# EAGLE board RS485 RX (EAGLE 9.6.2)
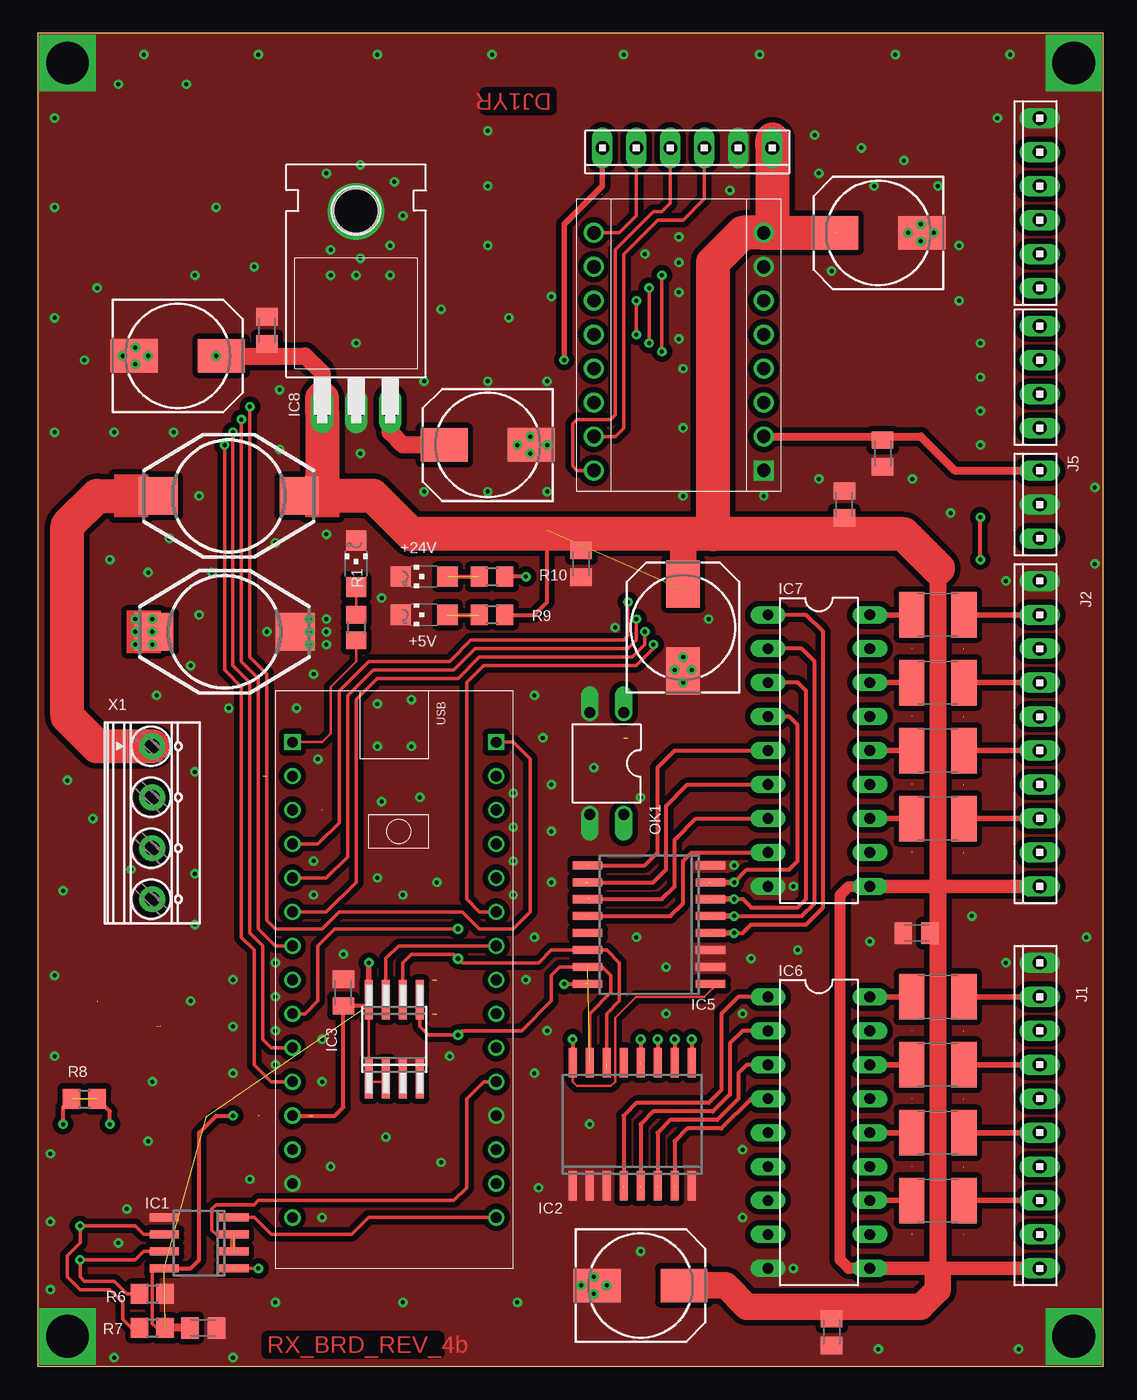
[diagram p0: board, top side]
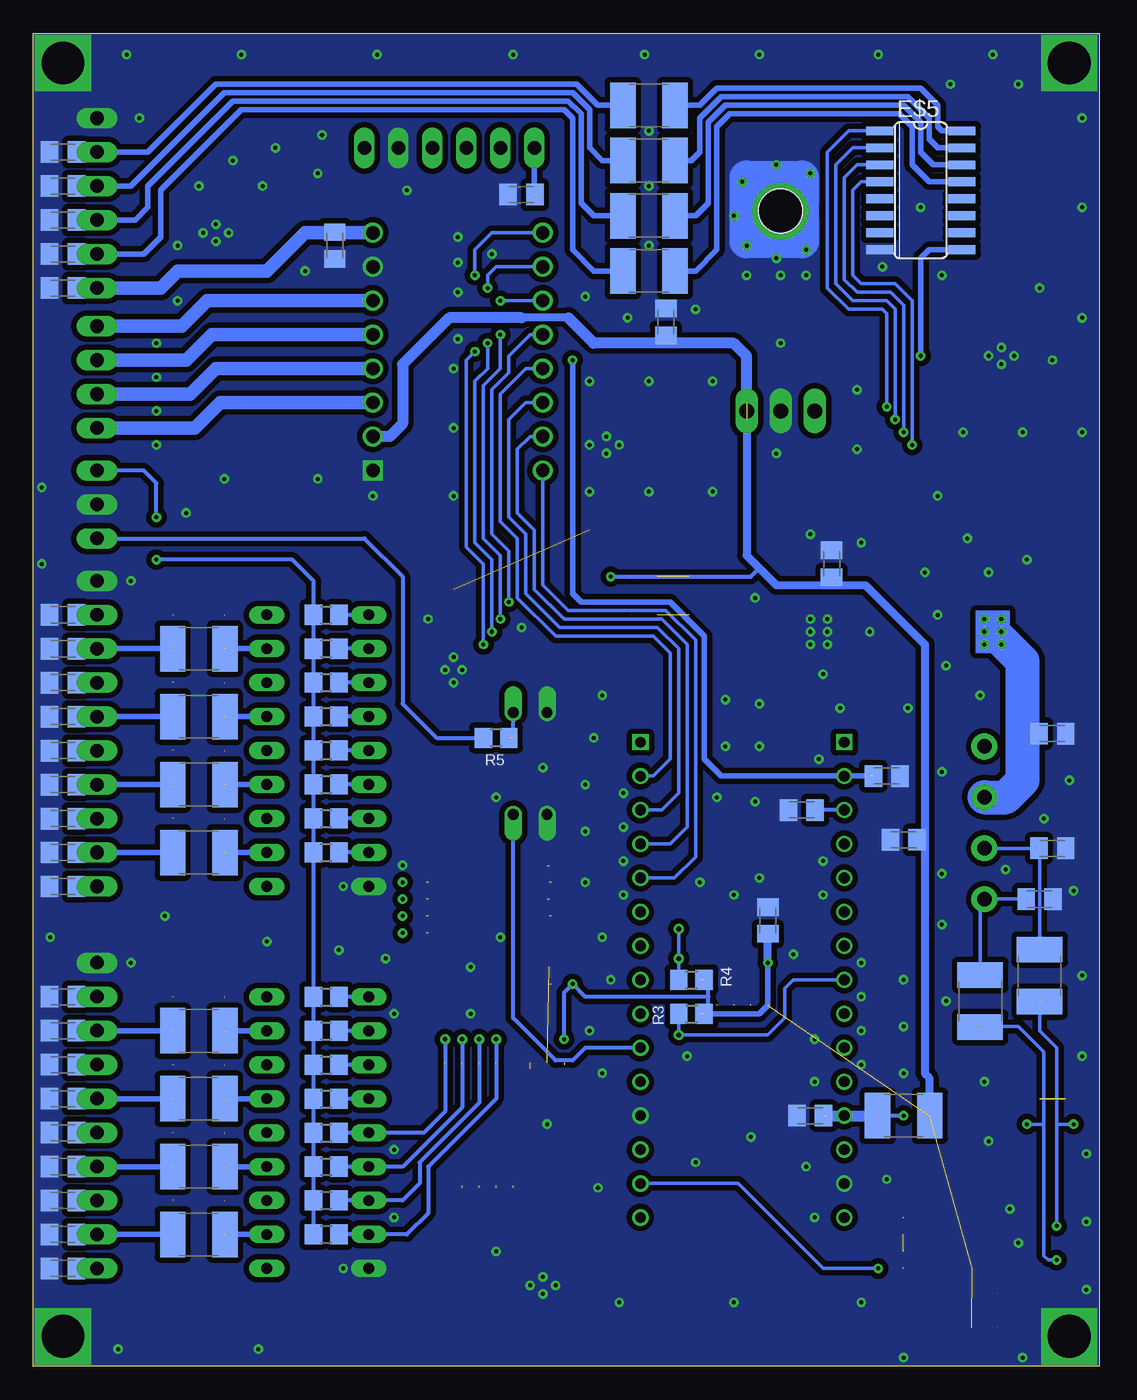
[diagram p1: board, bottom side, seen from below]

Size 79.68 x 99.69 mm. Coordinates in mm from the lower left corner, seen from the top.
Outline: 0,0 79.68,0 79.68,99.69 0,99.69 0,0
Copper layers (1*16): Top 0.035mm / dielectric 1.5mm / Bottom 0.035mm
Design rules "default *": minimum track width 6mil, minimum drill 0.35mm, track to track 6mil, track to pad 6mil, pad to pad 6mil, via to via 6mil, smd to smd 6mil, copper to edge 0mil, drill to drill 6mil, minimum pad ring 10mil, minimum via ring 8mil, stop-mask expansion 4mil, vias tented up to drill 0mil, thermal gap 10mil

## Footprints (pad centres in the part's own frame; a part is rotated, then mirrored left to right if it is on the bottom)
CHIPLED_1206 = smd 1.5 x 1.5: A 0,-1.75; C 0,1.75
C0805K = smd 1.3 x 1.6: 1 -1,0; 2 1,0
150CLZ-0810 = smd 3.5 x 2.5: + 3.25,0; - -3.25,0
10X04MTA = drill 1.016 long: 1 3.81,0; 2 1.27,0; 3 -1.27,0; 4 -3.81,0
DO3316P = smd 2.92 x 2.79: 1 -5.28,0; 2 5.28,0
SO-08M = smd 0.6 x 2.2: 1 -1.905,-3.33; 2 -0.635,-3.33; 3 0.635,-3.33; 4 1.905,-3.33; 5 1.905,3.33; 6 0.635,3.33; 7 -0.635,3.33; 8 -1.905,3.33
SO16 = smd 0.66 x 2.032: 1 -4.445,-3.073; 2 -3.175,-3.073; 3 -1.905,-3.073; 4 -0.635,-3.073; 5 0.635,-3.073; 6 1.905,-3.073; 7 3.175,-3.073; 8 4.445,-3.073; 9 4.445,3.073; 10 3.175,3.073; 11 1.905,3.073; 12 0.635,3.073; 13 -0.635,3.073; 14 -1.905,3.073; 15 -3.175,3.073; 16 -4.445,3.073
10X06MTA = drill 1.016 long: 1 6.35,0; 2 3.81,0; 3 1.27,0; 4 -1.27,0; 5 -3.81,0; 6 -6.35,0
SOIC8 = smd 0.6 x 2.2: 1 -1.905,-2.6; 2 -0.635,-2.6; 3 0.635,-2.6; 4 1.905,-2.6; 5 1.905,2.6; 6 0.635,2.6; 7 -0.635,2.6; 8 -1.905,2.6
SO16W = smd 0.6 x 2.2: 1 -4.445,-4.6; 2 -3.175,-4.6; 3 -1.905,-4.6; 4 -0.635,-4.6; 5 0.635,-4.6; 6 1.905,-4.6; 7 3.175,-4.6; 8 4.445,-4.6; 9 4.445,4.6; 10 3.175,4.6; 11 1.905,4.6; 12 0.635,4.6; 13 -0.635,4.6; 14 -1.905,4.6; 15 -3.175,4.6; 16 -4.445,4.6
SO-08 = smd 0.6 x 2.2: 1 -1.905,-2.6; 2 -0.635,-2.6; 3 0.635,-2.6; 4 1.905,-2.6; 5 1.905,2.6; 6 0.635,2.6; 7 -0.635,2.6; 8 -1.905,2.6
DIL18 = drill 0.813 long: 1 -10.16,-3.81; 2 -7.62,-3.81; 3 -5.08,-3.81; 4 -2.54,-3.81; 5 0,-3.81; 6 2.54,-3.81; 7 5.08,-3.81; 8 7.62,-3.81; 9 10.16,-3.81; 10 10.16,3.81; 11 7.62,3.81; 12 5.08,3.81; 13 2.54,3.81; 14 0,3.81; 15 -2.54,3.81; 16 -5.08,3.81; 17 -7.62,3.81; 18 -10.16,3.81
TO220H = drill 1.118 long: 1 -2.54,-10.16; 2 0,-10.16; 3 2.54,-10.16 | hole 3.302: 0,4.826
10X10MTA = drill 1.016 long: 1 11.43,0; 2 8.89,0; 3 6.35,0; 4 3.81,0; 5 1.27,0; 6 -1.27,0; 7 -3.81,0; 8 -6.35,0; 9 -8.89,0; 10 -11.43,0
10X03MTA = drill 1.016 long: 1 2.54,0; 2 0,0; 3 -2.54,0
L1812 = smd 1.9 x 3.4: 1 -1.95,0; 2 1.95,0
DIL04 = drill 0.813 offset: 1 -1.27,-3.81; 2 1.27,-3.81; 3 1.27,3.81; 4 -1.27,3.81
R0805 = smd 1.3 x 1.5: 1 -0.95,0; 2 0.95,0
1727036 = drill 1.1 pad 1.93: 1 -5.715,0; 2 -1.905,0; 3 1.905,0; 4 5.715,0

## Placement (x,y rotation side)
+5V  [CHIPLED_1206]  28.89,56.2 90 top
+5V1  [CHIPLED_1206]  23.81,60.01 0 top
+24V  [CHIPLED_1206]  28.89,59.05 90 top
C1  [C0805K]  21.59,18.73 180 bottom
C2  10µ  [150CLZ-0810]  10.48,75.56 0 top
C3  10µ  [150CLZ-0810]  33.66,68.9 180 top
C4  100µ  [150CLZ-0810]  48.26,55.24 90 top
C5  10µ  [150CLZ-0810]  45.09,6.03 0 top
C6  [C0805K]  22.23,41.59 180 bottom
C7  [C0805K]  77.47,7.3 180 bottom
C8  [C0805K]  77.47,9.84 180 bottom
C9  [C0805K]  77.47,12.38 180 bottom
C10  [C0805K]  77.47,14.92 180 bottom
C11  [C0805K]  77.47,17.46 180 bottom
C12  [C0805K]  77.47,20 180 bottom
C13  [C0805K]  77.47,22.54 180 bottom
C14  [C0805K]  77.47,25.08 180 bottom
C15  [C0805K]  77.47,27.62 180 bottom
C16  [C0805K]  77.47,35.88 180 bottom
C17  [C0805K]  77.47,38.42 180 bottom
C18  [C0805K]  77.47,40.96 180 bottom
C19  [C0805K]  77.47,43.5 180 bottom
C20  [C0805K]  77.47,46.04 180 bottom
C21  [C0805K]  77.47,48.58 180 bottom
C22  [C0805K]  77.47,51.12 180 bottom
C23  [C0805K]  77.47,53.66 180 bottom
C24  [C0805K]  77.47,56.2 180 bottom
C25  [C0805K]  59.37,2.54 270 top
C26  [C0805K]  65.72,32.38 180 top
C27  [C0805K]  60.33,64.45 90 top
C28  [C0805K]  57.15,83.82 270 bottom
C29  [C0805K]  40.64,60.01 270 top
C30  [C0805K]  63.18,68.26 270 top
C31  [C0805K]  20,60.01 90 bottom
C32  [C0805K]  32.38,78.11 90 bottom
C33  [C0805K]  17.14,77.47 90 top
C34  [C0805K]  24.77,33.34 90 bottom
C35  [C0805K]  22.86,27.94 90 top
C36  [C0805K]  12.38,2.86 0 top
C37  [C0805K]  3.49,47.31 180 bottom
C38  [C0805K]  14.61,39.37 0 bottom
C39  [C0805K]  3.49,38.73 180 bottom
C40  [C0805K]  4.45,34.92 180 bottom
C41  100µ  [150CLZ-0810]  62.87,84.77 180 top
C42  [C0805K]  77.47,83.19 180 bottom
C43  [C0805K]  77.47,80.64 180 bottom
C44  [C0805K]  77.47,85.72 180 bottom
C45  [C0805K]  77.47,88.27 180 bottom
C46  [C0805K]  77.47,90.81 180 bottom
C47  [C0805K]  43.18,87.63 180 bottom
C48  [C0805K]  15.88,44.13 0 bottom
E$1  [10X04MTA]  74.93,73.98 90 top
E$2  [DO3316P]  14.29,65.09 0 top
E$3  [DO3316P]  13.97,54.93 0 top
E$4  [SO-08M]  26.67,24.45 0 top
E$5  [SO16]  13.34,87.95 270 bottom
E$7  [10X06MTA]  48.58,91.12 180 top
IC1  LTC485S  [SOIC8]  12.06,9.21 90 top
IC2  PCF8574T  [SO16W]  44.45,18.1 0 top
IC3  24LC128SN  [SO-08]  26.67,24.45 0 top
IC5  PCF8574T  [SO16W]  45.72,33.02 90 top
IC6  [DIL18]  58.42,17.46 270 top
IC7  [DIL18]  58.42,46.04 270 top
IC8  78S05T  [TO220H]  23.81,81.6 0 top
J1  [10X10MTA]  74.93,18.73 90 top
J2  [10X10MTA]  74.93,47.31 90 top
J3  [10X06MTA]  74.93,87 90 top
J5  [10X03MTA]  74.93,64.45 90 top
L1  [L1812]  14.61,18.73 0 bottom
L2  [L1812]  67.31,27.62 0 top
L3  [L1812]  67.31,25.08 180 bottom
L4  [L1812]  67.31,22.54 0 top
L5  [L1812]  67.31,20 180 bottom
L6  [L1812]  67.31,17.46 0 top
L7  [L1812]  67.31,14.92 180 bottom
L8  [L1812]  67.31,12.38 0 top
L9  [L1812]  67.31,9.84 180 bottom
L10  [L1812]  67.31,56.2 0 top
L11  [L1812]  67.31,53.66 180 bottom
L12  [L1812]  67.31,51.12 0 top
L13  [L1812]  67.31,48.58 180 bottom
L14  [L1812]  67.31,46.04 0 top
L15  [L1812]  67.31,43.5 180 bottom
L16  [L1812]  67.31,40.96 0 top
L17  [L1812]  67.31,38.42 180 bottom
L18  [L1812]  8.89,27.3 270 bottom
L19  [L1812]  4.45,29.21 270 bottom
L20  [L1812]  33.66,94.3 180 bottom
L21  [L1812]  33.66,90.17 180 bottom
L22  [L1812]  33.66,86.04 180 bottom
L23  [L1812]  33.66,81.92 180 bottom
OK1  PC817  [DIL04]  42.55,45.09 180 top
R1  3k3  [R0805]  23.81,55.24 270 top
R3  4k7  [R0805]  30.48,26.35 0 bottom
R4  4k7  [R0805]  30.48,28.89 0 bottom
R5  330R  [R0805]  45.09,46.99 180 bottom
R6  4k7  [R0805]  8.57,5.4 0 top
R7  4k7  [R0805]  8.57,2.86 0 top
R8  120R  [R0805]  3.49,20 0 top
R9  3k3  [R0805]  33.97,56.2 180 top
R10  330R  [R0805]  33.97,59.05 0 top
R11  10k  [R0805]  57.78,9.84 0 bottom
R12  10k  [R0805]  57.78,12.38 0 bottom
R13  10k  [R0805]  57.78,14.92 0 bottom
R14  10k  [R0805]  57.78,17.46 0 bottom
R15  10k  [R0805]  57.78,20 0 bottom
R16  10k  [R0805]  57.78,22.54 0 bottom
R17  10k  [R0805]  57.78,25.08 0 bottom
R18  10k  [R0805]  57.78,27.62 0 bottom
R19  10k  [R0805]  57.78,38.42 0 bottom
R20  10k  [R0805]  57.78,40.96 0 bottom
R21  10k  [R0805]  57.78,43.5 0 bottom
R22  10k  [R0805]  57.78,46.04 0 bottom
R23  10k  [R0805]  57.78,48.58 0 bottom
R24  10k  [R0805]  57.78,51.12 0 bottom
R25  10k  [R0805]  57.78,53.66 0 bottom
R26  10k  [R0805]  57.78,56.2 0 bottom
X1  1727036  [1727036]  8.57,40.64 270 top

## Library data of the parts
+5V +5V1 +24V = led
C1-C48 = rcl; SPICEPREFIX: C
E$1 E$7 J1-J3 J5 = con-amp
E$2 E$3 = inductor-coilcraft
E$4 = microchip
E$5 IC6 IC7 = uln-udn
IC1 = 104-5
IC2 IC5 = micro-philips; MPN: PCF8574T/3,512; OC_FARNELL: 1201255; OC_NEWARK: 70R6870
IC3 = microchip; MF: MICROCHIP; MPN: 24LC128-I/SNG; OC_FARNELL: 9757937; OC_NEWARK: 30H1511
IC8 = linear
L1-L23 = rcl; SPICEPREFIX: L
OK1 = optocoupler; MPN: PC817X4J000F; OC_FARNELL: 9707727; OC_NEWARK: 97K7059
R1 R3-R26 = rcl; SPICEPREFIX: R
X1 = con-phoenix-3.81; MF: FARNELL; MPN: 1727036; OC_FARNELL: 3704592; OC_NEWARK: 71C4114

## Nets
3V3: C47.1 C48.1 E$7.1
11: E$1.4
12: E$1.3
14: E$1.1
+5V: IC1.8 IC2.16 IC3.8 IC5.16 J5.1 L1.2 R3.2 R4.2 R7.2 R10.2
+24V: C41.+ E$7.6 IC6.10 IC7.10 IC8.1 J1.10 J2.10 J3.6 R9.1
DIR: E$7.3
ENABLED: E$7.2
GND: +5V1.C +5V.C +24V.C C1.2 C2.- C3.- C4.- C5.- C6.2 C7.2 C8.2 C9.2 C10.2 C11.2 C12.2 C13.2 C14.2 C15.2 C16.2 C17.2 C18.2 C19.2 C20.2 C21.2 C22.2 C23.2 C24.2 C25.2 C26.2 C27.2 C28.2 C29.2 C30.2 C31.2 C32.2 C33.2 C34.2 C35.2 C36.2 C37.1 C38.1 C39.1 C40.1 C41.- C42.2 C43.2 C44.2 C45.2 C46.2 C47.2 C48.2 E$3.2 E$5.8 E$7.5 IC1.5 IC2.1 IC2.2 IC2.3 IC2.8 IC3.3 IC3.4 IC5.2 IC5.3 IC5.8 IC6.9 IC7.9 IC8.2 J1.1 J2.1 J3.1 J5.2 OK1.2 OK1.3 R6.2
N$9: IC2.4 IC6.1
N$10: IC2.5 IC6.2
N$11: IC2.6 IC6.3
N$13: IC2.7 IC6.4
N$14: L19.1
N$15: X1.1
N$18: IC5.4 IC7.1
N$19: IC5.5 IC7.2
N$20: IC5.6 IC7.3
N$21: IC5.7 IC7.4
N$22: IC5.9 IC7.5
N$23: IC5.10 IC7.6
N$24: IC5.11 IC7.7
N$25: IC5.12 IC7.8
N$26: IC6.18 L2.1
N$27: IC6.17 L3.1
N$28: IC6.16 L4.1
N$29: IC6.15 L5.1
N$30: IC6.14 L6.1
N$31: IC6.13 L7.1
N$32: IC6.12 L8.1
N$33: IC6.11 L9.1
N$34: IC7.18 L10.1
N$35: IC7.17 L11.1
N$36: IC7.16 L12.1
N$37: IC7.15 L13.1
N$38: IC7.14 L14.1
N$39: IC7.13 L15.1
N$40: IC7.12 L16.1
N$41: IC7.11 L17.1
N$42: J1.2 L2.2
N$43: J1.3 L3.2
N$44: J1.4 L4.2
N$45: J1.5 L5.2
N$46: J1.6 L6.2
N$47: J1.7 L7.2
N$48: J1.8 L8.2
N$49: J1.9 L9.2
N$50: J2.2 L10.2
N$51: J2.3 L11.2
N$53: J2.5 L13.2
N$54: J2.6 L14.2
N$55: J2.7 L15.2
N$56: J2.8 L16.2
N$57: J2.9 L17.2
N$58: J2.4 L12.2
N$59: OK1.1 R5.1
N$60: IC2.12 IC6.8
N$61: IC2.11 IC6.7
N$62: IC2.10 IC6.6
N$63: IC2.9 IC6.5
N$64: J5.3 R5.2
N$66: C6.1
N$68: L18.2 R6.1 R8.1
N$69: L19.2 R7.1 R8.2
N$78: C1.1 L1.1
N$80: +5V.A R9.2
N$81: +24V.A R10.1
RS_EN: IC1.2 IC1.3
RX: IC1.1
S$1: X1.2
S$2: L18.1
S$3: X1.3
S$4: X1.4
S$7: IC5.14
S$37: J3.5
S$39: J3.3
S$40: J3.2
S$41: J3.4
SCL: IC2.14 IC3.6 R4.1
SDA: IC2.15 IC3.5 IC5.15 R3.1
STEP: E$7.4
SYNC: OK1.4
TX: IC1.4
WP: IC3.7

## Tracks (layer width: path | path; a pad name or v marks a point on that pad's centre or on a via)
3V3  (via drill 0.3, 0.8)  (2 unrouted)
  Top 0.406: E$7.1 42.23,89.22 42.23,88.27 39.37,85.41 v39.37,75.25
  Bottom 0.406: v39.37,75.25 39.37,57.78 38.73,57.15 32.07,57.15 29.53,54.61 29.53,45.4 28.26,44.13 v19.05,44.13 17.14,44.13 | 42.23,87.63 E$7.1
11  (via drill 1)
  Bottom 1.016: v54.29,72.07 65.72,72.07 67.63,70.17 E$1.4
12  (via drill 1)
  Bottom 1.016: v54.29,74.61 66.04,74.61 67.94,72.71 E$1.3
13  (via drill 1)
  Bottom 1.016: v54.29,77.15 66.36,77.15 68.26,75.25 74.93,75.25
14  (via drill 1)
  Bottom 1.016: v54.29,79.69 66.67,79.69 68.58,77.79 E$1.1
+5V  (via drill 0.3, 1)  (11 unrouted)
  Top 0.203: 40.01,23.18 40.01,21.27 40.32,20.95 42.86,20.95 43.18,21.27 43.18,26.04 44.77,27.62 49.85,27.62 50.48,28.26 50.48,28.57
  Top 0.305: v40.01,24.45 40.01,23.18 40.01,22.54 | v39.37,28.57 40.96,28.57 | v36.51,59.05 R10.2 | v70.48,60.33 v70.48,63.5
  Top 0.406: v24.77,30.16 24.77,26.99
  Top 0.61: J5.1 68.58,66.99 66.04,69.53 v54.29,69.53
  Bottom 0.305: 29.84,26.35 R3.2 29.21,26.35 29.21,27.62 | 29.21,27.62 29.21,28.89 29.84,28.89 | v40.01,24.45 40.01,27.94 v39.37,28.57 38.42,27.62 29.21,27.62 | v36.51,59.05 26.04,59.05 25.4,59.69 | v70.48,60.33 60.33,60.33 58.74,58.74 58.74,9.53 | v70.48,63.5 70.48,66.04 71.44,66.99 J5.1
  Bottom 0.406: R3.2 25.4,26.35 24.77,26.99 v24.77,30.16
  Bottom 0.61: 26.35,70.8 26.35,60.64 25.4,59.69 24.13,58.42 17.46,58.42 13.02,53.98 13.02,21.91 12.7,21.59 12.7,18.73 | 39.69,78.42 43.18,78.42 | v24.77,30.16 24.77,32.38
  Bottom 0.813: 26.35,72.07 26.35,75.56 27.3,76.52 37.78,76.52 39.69,78.42 | 43.18,78.42 48.58,78.42 52.07,74.93 52.07,70.48 53.02,69.53 v54.29,69.53
+24V  (via drill 0.3, 1)  (3 unrouted)
  Top 0.305: R9.1 37.15,56.2 38.1,57.15 38.1,62.55
  Top 0.813: IC6.10 60.64,7.3 60.01,7.94 60.01,35.24 60.64,35.88 IC7.10
  Top 1.016: J1.10 IC6.10 | J2.10 67.31,35.88 IC7.10
  Top 1.27: 67.31,59.69 67.31,35.88 67.31,6.67 67.31,6.03 | v13.34,75.56 20,75.56 21.27,74.3 21.27,72.07
  Top 2: 48.26,58.1 48.26,62.23 | 48.26,6.03 51.44,6.03 53.02,4.45 66.04,4.45 67.31,5.71 67.31,6.67
  Top 2.54: 67.31,59.69 64.77,62.23 50.48,62.23 | 50.48,62.23 48.26,62.23 27.94,62.23 25.08,65.09 21.27,65.09 | 21.27,65.09 19.68,65.09 | 50.48,62.23 50.48,82.55 52.7,84.77 v54.29,84.77 54.93,84.77 | 21.27,72.39 21.27,72.07 IC8.1 21.27,65.09 | 54.93,84.77 59.69,84.77 | 54.93,91.76 E$7.6 54.93,84.77
  Bottom 0.406: 10.16,83.5 12.7,83.5 13.34,82.87 v13.34,75.56
  Bottom 1.016: v54.29,84.77 59.37,84.77 62.23,81.92 68.9,81.92 70.17,80.64 J3.6
DIR  (via drill 1)
  Top 0.254: E$7.3 47.31,87 46.67,86.36 46.04,86.36 43.18,83.5 43.18,71.12 42.86,70.8 40.32,70.8 40.01,70.48 40.01,67.31 40.32,66.99 v41.59,66.99
  Bottom 0.254: v41.59,66.99 41.59,58.42 39.69,56.52 32.38,56.52 30.16,54.29 30.16,38.1 31.75,36.51 34.29,36.51
ENABLED  (via drill 0.3, 0.8, 1)
  Top 0.254: v46.67,81.6 v46.67,75.88 | v46.04,53.98 46.04,53.66 44.77,52.39 33.34,52.39 32.07,51.12 32.07,34.92 33.02,33.97 v34.29,33.97 | v41.59,84.77 43.5,84.77 44.77,86.04 E$7.2
  Bottom 0.254: v41.59,84.77 45.4,84.77 46.67,83.5 v46.67,81.6 | v46.67,75.88 47.31,75.25 47.31,61.28 46.04,60.01 v46.04,53.98
GND  (via drill 0.3, 0.8, 1, 3.2)
  Bottom 2.54: 22.23,84.14 26.35,84.14 26.35,88.9 22.23,88.9 22.23,84.14
  other vias: 54.29,82.23 56.52,35.88 52.07,37.47 72.39,30.16 72.39,58.74 2.22,97.47 77.47,97.47 2.22,2.22 77.47,2.22 23.81,86.36 62.23,31.75 53.34,30.48 46.99,29.84 38.1,68.9 35.88,68.9 48.26,53.02 48.26,51.12 6.35,75.56 8.26,75.56 40.64,6.03 42.55,6.03 56.52,7.3 54.29,66.99 36.83,69.53 36.83,68.26 48.9,52.07 47.62,52.07 41.59,5.4 41.59,6.67 7.3,76.2 7.3,74.93 38.1,25.08 20.64,35.24 20.64,37.78 22.86,30.8 27.3,35.24 28.57,42.55 25.4,49.53 35.56,40.32 35.56,37.78 35.56,35.24 21.91,14.92 26.04,17.14 30.8,23.18 21.27,11.11 15.88,13.97 37.15,21.91 37.47,13.34 41.27,18.1 46.99,26.35 52.7,26.35 52.7,16.19 52.7,11.11 45.09,8.57 35.88,4.76 27.3,4.76 17.78,4.76 17.14,54.93 20.64,51.75 25.72,57.47 21.59,62.23 17.78,61.59 13.02,59.37 11.43,52.39 11.75,44.45 4.13,40.96 11.75,33.02 11.43,27.3 8.57,21.27 8.26,16.83 0.95,5.71 0.95,15.88 1.27,23.18 1.27,29.21 1.91,35.56 2.22,43.81 11.75,36.83 5.4,60.33 9.84,61.91 18.1,73.03 10.16,69.85 5.71,69.85 3.49,75.25 4.45,80.64 16.19,82.23 30.16,79.06 45.4,83.19 35.24,78.42 33.66,83.82 33.66,88.27 23.81,76.52 24.13,68.26 28.89,65.41 33.66,65.41 38.1,65.41 38.1,73.66 33.66,73.66 28.89,73.66 48.26,74.61 48.26,70.17 48.26,65.09 54.29,65.09 58.42,66.36 65.41,66.36 68.26,63.82 79.06,65.72 70.48,73.98 68.9,79.69 70.48,76.52 59.37,81.92 43.81,98.11 33.97,98.11 25.4,98.11 16.51,98.11 23.81,81.6 6.03,95.89 7.94,98.11 11.75,81.6 1.27,86.68 1.27,69.85 1.27,78.42 18.1,68.58 44.77,32.07 56.83,31.11 69.85,33.66 78.42,32.07 6.99,37.15 14.29,49.21 20.95,45.4 45.09,42.55 41.59,44.77 79.06,60.01 0.95,10.79 5.71,0.64 14.61,0.64 62.87,1.27 73.34,1.27 1.27,93.34 11.11,95.89 33.66,92.39 64.77,90.17 61.59,91.12 58.1,92.08 67.31,88.27 58.42,89.22 71.75,93.34 53.98,98.11 64.14,98.11 72.71,98.11 70.48,71.44 36.51,28.89 35.56,42.86 50.16,55.88 37.15,50.16 17.78,30.16 30.16,15.24 65.09,84.77 66.99,84.77 66.04,85.41 66.04,84.14 20.32,55.88 21.59,55.88 21.59,54.93 21.59,53.98 20.32,53.98 20.32,54.93 34.29,18.73 19.05,13.65 37.78,46.99 38.42,43.5 38.42,40.01 38.42,36.2 37.15,32.07 19.37,49.21 17.78,27.62 17.78,25.08 17.78,22.54 14.61,21.91 14.61,25.4 14.61,28.89 21.27,21.27 21.27,24.45 13.34,86.68 12.06,65.09 70.48,68.9 38.42,80.01 47.94,82.55 47.94,80.33 47.94,84.45 68.9,83.82 62.55,88.27 6.03,9.21 6.67,11.75 25.4,46.35 43.18,55.24 47.94,76.83 51.75,87.95 27.94,46.35 27.94,49.85 25.72,42.23 29.84,36.2 25.4,36.51 8.89,50.16 12.06,56.2 8.26,59.37 21.91,83.5 24.13,82.87 26.35,83.82 27.3,86.04 26.67,88.58 24.13,89.85 21.59,89.22 26.35,81.6 21.91,81.6
  pour Top (isolate 0.406, no thermals): 0,99.69 79.69,99.69 79.69,0 0,0
  pour Bottom (isolate 0.406, no thermals): 0,99.69 0,0 79.69,0 79.69,99.69
MS1  (via drill 0.3, 0.8, 1)
  Top 0.254: v45.72,80.64 v45.72,76.52 | v45.4,54.93 45.4,53.98 44.45,53.02 33.02,53.02 31.43,51.44 25.4,51.44 23.81,49.85 23.81,36.2 21.59,33.97 v19.05,33.97
  Bottom 0.254: v41.59,82.23 45.09,82.23 45.72,81.6 v45.72,80.64 | v45.72,76.52 45.72,74.61 46.67,73.66 46.67,61.59 45.4,60.33 v45.4,54.93
MS2  (via drill 0.3, 0.8, 1)
  Top 0.254: v44.77,79.69 v44.77,77.15 | v44.77,55.88 44.77,54.29 44.13,53.66 32.7,53.66 31.11,52.07 25.08,52.07 23.18,50.16 23.18,38.1 21.59,36.51 v19.05,36.51
  Bottom 0.254: v41.59,79.69 v44.77,79.69 | v44.77,77.15 44.77,74.61 46.04,73.34 46.04,61.91 44.77,60.64 v44.77,55.88
MS3  (via drill 0.3, 0.8, 1)
  Top 0.254: v44.13,57.15 44.13,54.61 43.81,54.29 32.38,54.29 30.8,52.7 24.77,52.7 22.54,50.48 22.54,40.64 20.95,39.05 v19.05,39.05
  Bottom 0.254: v41.59,77.15 42.55,77.15 44.13,75.56 44.13,74.3 45.4,73.03 45.4,62.23 44.13,60.96 v44.13,57.15
N$6
  Top 0.254: 9.53,9.84 7.94,9.84 7.3,10.48 3.17,10.48
N$7
  Top 0.254: 9.53,8.57 7.94,8.57 7.3,7.94 3.17,7.94
N$9  (1 unrouted)
  Top 0.305: IC6.1 52.39,27.62 51.12,26.35 51.12,20.64 50.16,19.68 44.77,19.68 43.81,18.73 43.81,13.34
  Bottom 0.305: IC6.1 56.83,27.62
N$10  (1 unrouted)
  Top 0.305: IC6.2 52.7,25.08 51.75,24.13 51.75,20.32 50.48,19.05 46.04,19.05 45.09,18.1 45.09,13.34
  Bottom 0.305: IC6.2 56.83,25.08
N$11  (1 unrouted)
  Top 0.305: IC6.3 53.02,22.54 52.39,21.91 52.39,20 50.8,18.41 47.31,18.41 46.35,17.46 46.35,13.34
  Bottom 0.305: IC6.3 56.83,22.54
N$12
  Top 0.305: 30.8,59.05 33.02,59.05
N$13  (1 unrouted)
  Top 0.305: IC6.4 53.34,20 51.12,17.78 48.58,17.78 47.62,16.83 47.62,13.34
  Bottom 0.305: IC6.4 56.83,20
N$15
  Top 2.54: X1.1 4.45,46.35 2.22,48.58 2.22,62.87 4.45,65.09 8.89,65.09
N$17
  Top 1.27: 30.48,68.9 27.3,68.9 26.35,69.85 26.35,71.75
N$18  (via drill 0.3)  (1 unrouted)
  Top 0.305: v52.07,32.38 52.7,32.38 53.34,33.02 57.47,33.02 58.74,34.29 58.74,54.93 57.47,56.2 IC7.1
  Top 0.406: v52.07,32.38 50.16,32.38
  Bottom 0.305: IC7.1 56.83,56.2
N$19  (via drill 0.3)  (1 unrouted)
  Top 0.305: v52.07,33.66 57.15,33.66 58.1,34.61 58.1,52.7 57.15,53.66 IC7.2
  Top 0.406: v52.07,33.66 50.16,33.66
  Bottom 0.305: IC7.2 56.83,53.66
N$20  (via drill 0.3)  (1 unrouted)
  Top 0.305: v52.07,34.92 52.7,34.92 53.34,34.29 56.83,34.29 57.47,34.92 57.47,50.48 56.83,51.12 IC7.3
  Top 0.406: v52.07,34.92 50.16,34.92
  Bottom 0.305: IC7.3 56.83,51.12
N$21  (via drill 0.3)  (1 unrouted)
  Top 0.305: v52.07,36.2 53.02,37.15 56.2,37.15 56.83,37.78 56.83,47.94 56.2,48.58 IC7.4
  Top 0.406: v52.07,36.2 50.16,36.2
  Bottom 0.305: IC7.4 56.83,48.58
N$22  (1 unrouted)
  Top 0.305: 41.27,37.47 45.4,37.47 46.35,38.42 46.35,44.77 47.62,46.04 IC7.5
  Bottom 0.305: IC7.5 56.83,46.04
N$23  (1 unrouted)
  Top 0.305: 40.96,36.2 46.04,36.2 46.99,37.15 46.99,41.91 48.58,43.5 IC7.6
  Bottom 0.305: IC7.6 56.83,43.5
N$24  (1 unrouted)
  Top 0.305: 41.27,34.92 46.67,34.92 47.62,35.88 47.62,39.37 49.21,40.96 IC7.7
  Bottom 0.305: IC7.7 56.83,40.96
N$25  (1 unrouted)
  Top 0.305: 40.96,33.66 47.31,33.66 48.26,34.61 48.26,37.78 48.9,38.42 IC7.8
  Bottom 0.305: IC7.8 56.83,38.42
N$26  (1 unrouted)
  Top 0.406: IC6.18 65.41,27.62
N$27  (1 unrouted)
  Bottom 0.406: IC6.17 65.41,25.08
N$28  (1 unrouted)
  Top 0.406: IC6.16 65.41,22.54
N$29  (1 unrouted)
  Bottom 0.406: IC6.15 65.41,20
N$30  (1 unrouted)
  Top 0.406: IC6.14 65.41,17.46
N$31  (1 unrouted)
  Bottom 0.406: IC6.13 65.41,14.92
N$32  (1 unrouted)
  Top 0.406: IC6.12 65.41,12.38
N$33  (1 unrouted)
  Bottom 0.406: IC6.11 65.41,9.84
N$34  (1 unrouted)
  Top 0.406: IC7.18 65.41,56.2
N$35  (1 unrouted)
  Bottom 0.406: IC7.17 65.41,53.66
N$36  (1 unrouted)
  Top 0.406: IC7.16 65.41,51.12
N$37  (1 unrouted)
  Bottom 0.406: IC7.15 65.41,48.58
N$38  (1 unrouted)
  Top 0.406: IC7.14 65.41,46.04
N$39  (1 unrouted)
  Bottom 0.406: IC7.13 65.41,43.5
N$40  (1 unrouted)
  Top 0.406: IC7.12 65.41,40.96
N$41  (1 unrouted)
  Bottom 0.406: IC7.11 65.41,38.42
N$42  (1 unrouted)
  Top 0.406: J1.2 69.22,27.62
N$43  (1 unrouted)
  Bottom 0.406: 69.22,25.08 J1.3
N$44  (1 unrouted)
  Top 0.406: J1.4 69.22,22.54
N$45  (1 unrouted)
  Bottom 0.406: J1.5 69.22,20
N$46  (1 unrouted)
  Top 0.406: J1.6 69.22,17.46
N$47  (1 unrouted)
  Bottom 0.406: J1.7 69.22,14.92
N$48  (1 unrouted)
  Top 0.406: J1.8 69.22,12.38
N$49  (1 unrouted)
  Bottom 0.406: J1.9 69.22,9.84
N$50  (1 unrouted)
  Top 0.406: 69.22,56.2 J2.2
N$51  (1 unrouted)
  Bottom 0.406: J2.3 69.22,53.66
N$53  (1 unrouted)
  Bottom 0.406: J2.5 69.22,48.58
N$54  (1 unrouted)
  Top 0.406: 69.22,46.04 J2.6
N$55  (1 unrouted)
  Bottom 0.406: J2.7 69.22,43.5
N$56  (1 unrouted)
  Top 0.406: 69.22,40.96 J2.8
N$57  (1 unrouted)
  Bottom 0.406: 69.22,38.42 J2.9
N$58  (1 unrouted)
  Top 0.406: 69.22,51.12 J2.4
N$59  (1 unrouted)
  Bottom 0.305: 43.81,46.99 OK1.1
N$60  (via drill 0.35)  (1 unrouted)
  Top 0.305: v45.09,24.45 45.09,22.54
  Bottom 0.305: v45.09,24.45 45.09,20 50.16,14.92 50.16,11.43 51.75,9.84 IC6.8 56.83,9.84
N$61  (via drill 0.35)  (1 unrouted)
  Top 0.305: v46.35,24.45 46.35,22.54
  Bottom 0.305: v46.35,24.45 46.35,19.68 50.8,15.24 50.8,13.65 52.07,12.38 IC6.7 56.83,12.38
N$62  (via drill 0.35)  (1 unrouted)
  Top 0.305: v47.62,24.45 47.62,22.54
  Bottom 0.305: v47.62,24.45 47.62,19.37 52.07,14.92 IC6.6 56.83,14.92
N$63  (via drill 0.35)  (1 unrouted)
  Top 0.305: v48.9,24.45 48.9,22.54
  Bottom 0.305: v48.9,24.45 48.9,19.05 50.48,17.46 IC6.5 56.83,17.46
N$64  (1 unrouted)
  Bottom 0.305: J5.3 54.93,61.91 52.07,59.05 52.07,49.53 49.53,46.99 R5.2
N$66  (via drill 0.8)  (1 unrouted)
  Bottom 0.305: v19.05,41.59 21.27,41.59
N$68  (via drill 0.3)  (3 unrouted)
  Top 0.254: v3.17,7.94 3.17,6.67 3.49,6.35 5.71,6.35 6.67,5.4 R6.1
  Top 0.305: v5.4,18.1 5.4,19.05 4.45,20
  Bottom 0.254: v3.17,7.94 3.81,7.94 4.13,8.26 4.13,18.1 | 4.13,18.1 4.13,23.5 6.03,25.4 9.21,25.4 | v5.4,18.1 4.13,18.1
N$69  (via drill 0.3)  (3 unrouted)
  Top 0.254: v3.17,10.48 3.17,9.21 2.22,8.26 2.22,6.67 3.17,5.71 5.4,5.71 6.35,4.76 6.35,3.49 6.99,2.86 R7.1
  Top 0.305: v1.91,18.1 1.91,19.37 2.54,20
  Bottom 0.254: v3.17,10.48 3.17,18.1 | 3.17,18.1 3.17,23.81 4.45,25.08 4.45,27.3 | v1.91,18.1 3.17,18.1
N$78  (via drill 0.3, 0.8)  (2 unrouted)
  Top 0.203: 26.04,21.27 24.77,21.27 24.77,26.99
  Top 0.254: 9.53,2.86 8.89,2.86 8.57,3.17 8.57,7.3 9.53,7.3
  Top 0.305: 9.53,7.3 11.43,7.3 12.06,7.94 12.06,17.46 13.34,18.73 v14.61,18.73 | 24.77,26.99 22.86,26.99 22.86,19.37 22.23,18.73 v19.05,18.73
  Top 0.61: 11.43,2.86 9.53,2.86
  Bottom 0.305: v14.61,18.73 16.83,18.73
  Bottom 0.813: 20.32,18.73 v19.05,18.73 16.83,18.73 16.51,18.73
N$79
  Top 0.305: 30.8,56.2 33.02,56.2
N$80  (1 unrouted)
N$81  (1 unrouted)
RS_EN  (2 unrouted)
  Top 0.254: 14.61,9.84 13.34,9.84 13.02,10.16 13.02,11.75 13.34,12.06 16.19,12.06 16.51,12.38 31.11,12.38 32.07,13.34 32.07,20 33.34,21.27 34.29,21.27
  Top 0.406: 14.61,9.84 14.61,8.57
RST  (via drill 1)
  Bottom 0.254: 34.29,44.13 33.34,44.13 32.07,45.4 32.07,53.34 33.34,54.61 40.64,54.61 43.5,57.47 43.5,61.91 44.77,63.18 44.77,72.71 42.86,74.61 v41.59,74.61
RX  (via drill 0.3)  (1 unrouted)
  Top 0.254: 14.61,7.3 v16.51,7.3
  Bottom 0.254: v16.51,7.3 20.64,7.3 26.99,13.65 34.29,13.65
S$1
  Bottom 2.54: X1.2 6.99,42.55 5.71,43.81 5.71,52.7 7.94,54.93
S$3
  Bottom 0.254: X1.3 4.45,38.73 4.45,31.11
S$4
  Bottom 0.254: 8.89,29.21 8.89,34.61 X1.4 5.4,34.92
S$5  (via drill 0.3)
  other vias: 7.3,55.88
S$6  (via drill 0.3)
  other vias: 7.3,53.98
S$8  (via drill 0.3)
  other vias: 8.57,55.88
S$9  (via drill 0.3)
  other vias: 8.57,53.98
S$10  (via drill 0.3)
  other vias: 8.57,54.93
S$11  (via drill 0.3)
  other vias: 7.3,54.93
S$12
  Top 0.203: 23.81,56.2 23.81,58.42
S$13
  Bottom 0.406: 10.16,92.39 11.75,92.39 12.06,92.71 12.06,94.3 13.34,95.57 28.57,95.57 29.84,94.3 31.75,94.3
S$14  (via drill 0.8)
  other vias: 34.29,16.19
S$15
  Bottom 0.406: 10.16,91.12 12.06,91.12 12.7,91.76 12.7,93.34 14.29,94.93 28.26,94.93 29.84,93.34 29.84,90.81 30.48,90.17 31.75,90.17
S$16
  Bottom 0.406: 10.16,89.85 12.38,89.85 13.34,90.81 13.34,93.03 14.61,94.3 27.94,94.3 29.21,93.03 29.21,87 30.16,86.04 31.75,86.04
S$17  (via drill 0.3, 0.8)
  Top 0.254: v34.29,46.67 35.56,46.67 36.83,45.4 36.83,33.97 35.56,32.7 33.02,32.7 31.75,33.97 22.54,33.97 21.27,32.7 17.78,32.7 17.14,33.34 17.14,51.75 15.88,53.02 v15.88,71.75
  Bottom 0.254: v15.88,71.75 15.88,78.74 16.19,79.06 18.73,79.06 20.32,80.64 20.32,90.81 18.73,92.39 16.19,92.39
S$18  (via drill 0.8)
  other vias: 19.05,11.11
S$19  (via drill 0.8)
  other vias: 34.29,11.11
S$20  (via drill 0.3, 0.8)
  Top 0.254: v19.05,31.43 17.78,31.43 16.51,32.7 16.51,51.44 15.24,52.7 v15.24,70.8
  Bottom 0.254: v15.24,70.8 15.24,79.06 15.88,79.69 18.41,79.69 19.68,80.96 19.68,89.85 18.41,91.12 16.51,91.12
S$21  (via drill 0.8)
  other vias: 34.29,13.65
S$22  (via drill 0.8)
  other vias: 19.05,16.19
S$23  (via drill 0.3)
  Top 0.254: 19.05,23.81 17.46,23.81 16.83,24.45 16.83,31.43 15.88,32.38 15.88,51.12 14.61,52.39 v14.61,69.85
  Bottom 0.254: v14.61,69.85 14.61,79.38 15.56,80.33 18.1,80.33 19.05,81.28 19.05,88.9 18.1,89.85 16.51,89.85
S$24  (via drill 0.8)
  other vias: 34.29,21.27
S$25  (via drill 0.8)
  other vias: 19.05,21.27
S$26  (via drill 0.8)
  other vias: 19.05,23.81
S$27  (via drill 0.8)
  other vias: 34.29,26.35
S$28  (via drill 0.8)
  other vias: 34.29,28.89
S$30  (via drill 0.8)
  Top 0.203: v19.05,46.67 21.27,46.67 21.91,47.31 21.91,50.8 23.81,52.7 23.81,54.29
S$31  (via drill 0.8)
  other vias: 34.29,44.13
S$32  (via drill 0.8)
  other vias: 34.29,41.59
S$33  (via drill 0.8)
  other vias: 34.29,39.05
S$34  (via drill 0.8)
  other vias: 34.29,36.51
S$35  (via drill 0.3)
  Top 0.254: 19.05,21.27 17.46,21.27 16.19,22.54 16.19,31.11 15.24,32.07 15.24,50.8 13.97,52.07 v13.97,68.9
  Bottom 0.254: v13.97,68.9 13.97,79.69 15.24,80.96 17.78,80.96 18.41,81.6 18.41,87.95 17.78,88.58 16.51,88.58
S$36
  Bottom 0.406: 10.16,88.58 12.7,88.58 13.97,89.85 13.97,92.71 14.92,93.66 27.62,93.66 28.57,92.71 28.57,83.5 30.16,81.92 32.07,81.92
S$37
  Bottom 0.406: J3.5 71.44,83.19 70.17,84.45 70.17,87.95 64.14,93.98 40.01,93.98 39.37,93.34 39.37,83.5 37.78,81.92 35.56,81.92
S$39
  Bottom 0.406: J3.3 72.39,88.27 65.41,95.25 39.37,95.25 38.1,93.98 38.1,91.12 37.15,90.17 35.88,90.17
  Bottom 0.61: 35.56,90.17 35.88,90.17
S$40
  Bottom 0.406: J3.2 71.12,90.81 67.63,94.3 66.04,95.89 39.05,95.89 37.47,94.3 35.88,94.3
  Bottom 0.61: 35.56,94.3 35.88,94.3
S$41
  Bottom 0.406: J3.4 72.07,85.72 71.12,86.68 71.12,88.27 64.77,94.61 39.69,94.61 38.73,93.66 38.73,87 37.78,86.04 35.56,86.04
SCL  (via drill 0.35, 0.8)  (3 unrouted)
  Top 0.254: 27.3,26.99 27.3,30.16 27.94,30.8 31.11,30.8 v31.43,30.48 31.75,30.16 37.47,30.16 38.42,31.11 42.55,31.11 43.5,30.16 43.5,27.3 42.55,26.35 42.55,22.23 | v31.43,32.7 22.23,32.7 20.95,31.43 20.95,27.3 20,26.35 v19.05,26.35
  Bottom 0.254: R4.1 v31.43,30.48 v31.43,32.7
SDA  (via drill 0.35, 0.8)  (4 unrouted)
  Top 0.254: 41.27,22.86 41.27,26.35 42.86,27.94 42.86,29.21 42.23,29.84 39.05,29.84 38.42,29.21 38.42,27.3 36.2,25.08 31.75,25.08 v31.43,24.77 29.21,24.77 28.57,25.4 28.57,26.99
  Bottom 0.254: R3.1 v31.43,24.77 24.77,24.77 23.5,26.04 23.5,28.26 22.86,28.89 v19.05,28.89
SLP  (via drill 1)
  Bottom 0.254: v41.59,72.07 42.86,72.07 44.13,70.8 44.13,63.5 42.86,62.23 42.86,57.78 40.32,55.24 33.02,55.24 31.43,53.66 31.43,42.86 32.7,41.59 34.29,41.59
STEP  (via drill 1)
  Top 0.254: E$7.4 49.85,89.22 49.85,87.31 48.26,85.72 46.35,85.72 43.81,83.19 43.81,70.17 43.18,69.53 v41.59,69.53
  Bottom 0.254: v41.59,69.53 42.55,69.53 43.5,68.58 43.5,63.82 42.23,62.55 42.23,58.1 40.01,55.88 32.7,55.88 30.8,53.98 30.8,40.32 32.07,39.05 34.29,39.05
SYNC  (via drill 0.8)
  Bottom 0.305: v34.29,23.81 38.42,23.81 39.37,22.86 40.64,22.86 43.81,26.04 OK1.4
TX  (1 unrouted)
  Top 0.254: 14.61,11.11 16.19,11.11 17.46,9.84 23.5,9.84 24.77,11.11 34.29,11.11
WP  (via drill 0.8)  (1 unrouted)
  Top 0.254: 26.04,26.99 26.04,30.48 26.99,31.43 v34.29,31.43
(copper drawn outside any net)
  shapes: Bottom area x1, Top area x3

## Text on the board
Top: DJ1YR | RX_BRD_REV_4b
tPlace: USB